# Altium PCB PCB_01_02.PcbDoc
Units mil, origin at the board's own origin, x right, y up, seen from the top; angles counter-clockwise.
Board outline 3750 x 3090 mil, 2 copper layers (Top Layer, Bottom Layer); 25 components, 52 nets, 150 pads, 22 vias.
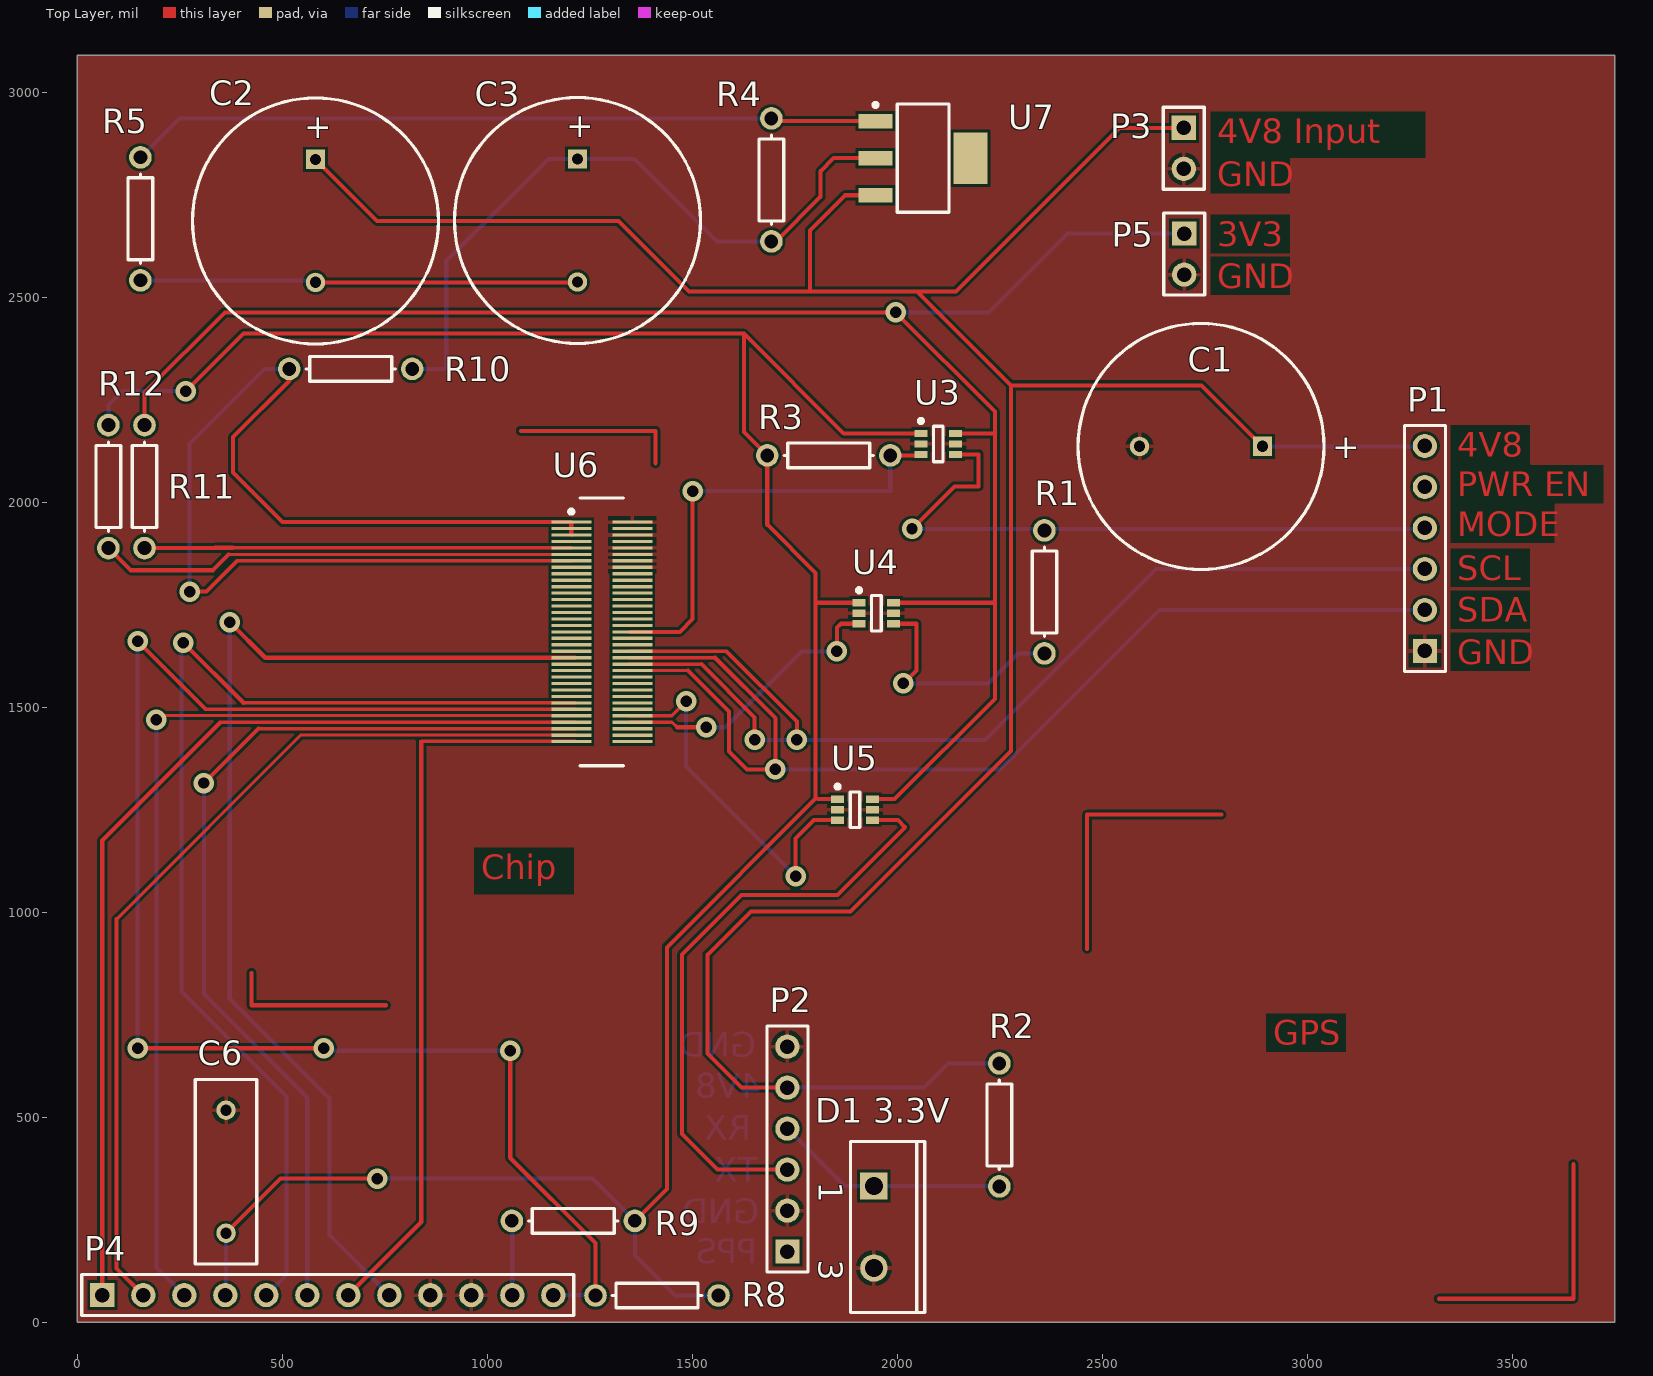
[diagram p0: Top Layer view]
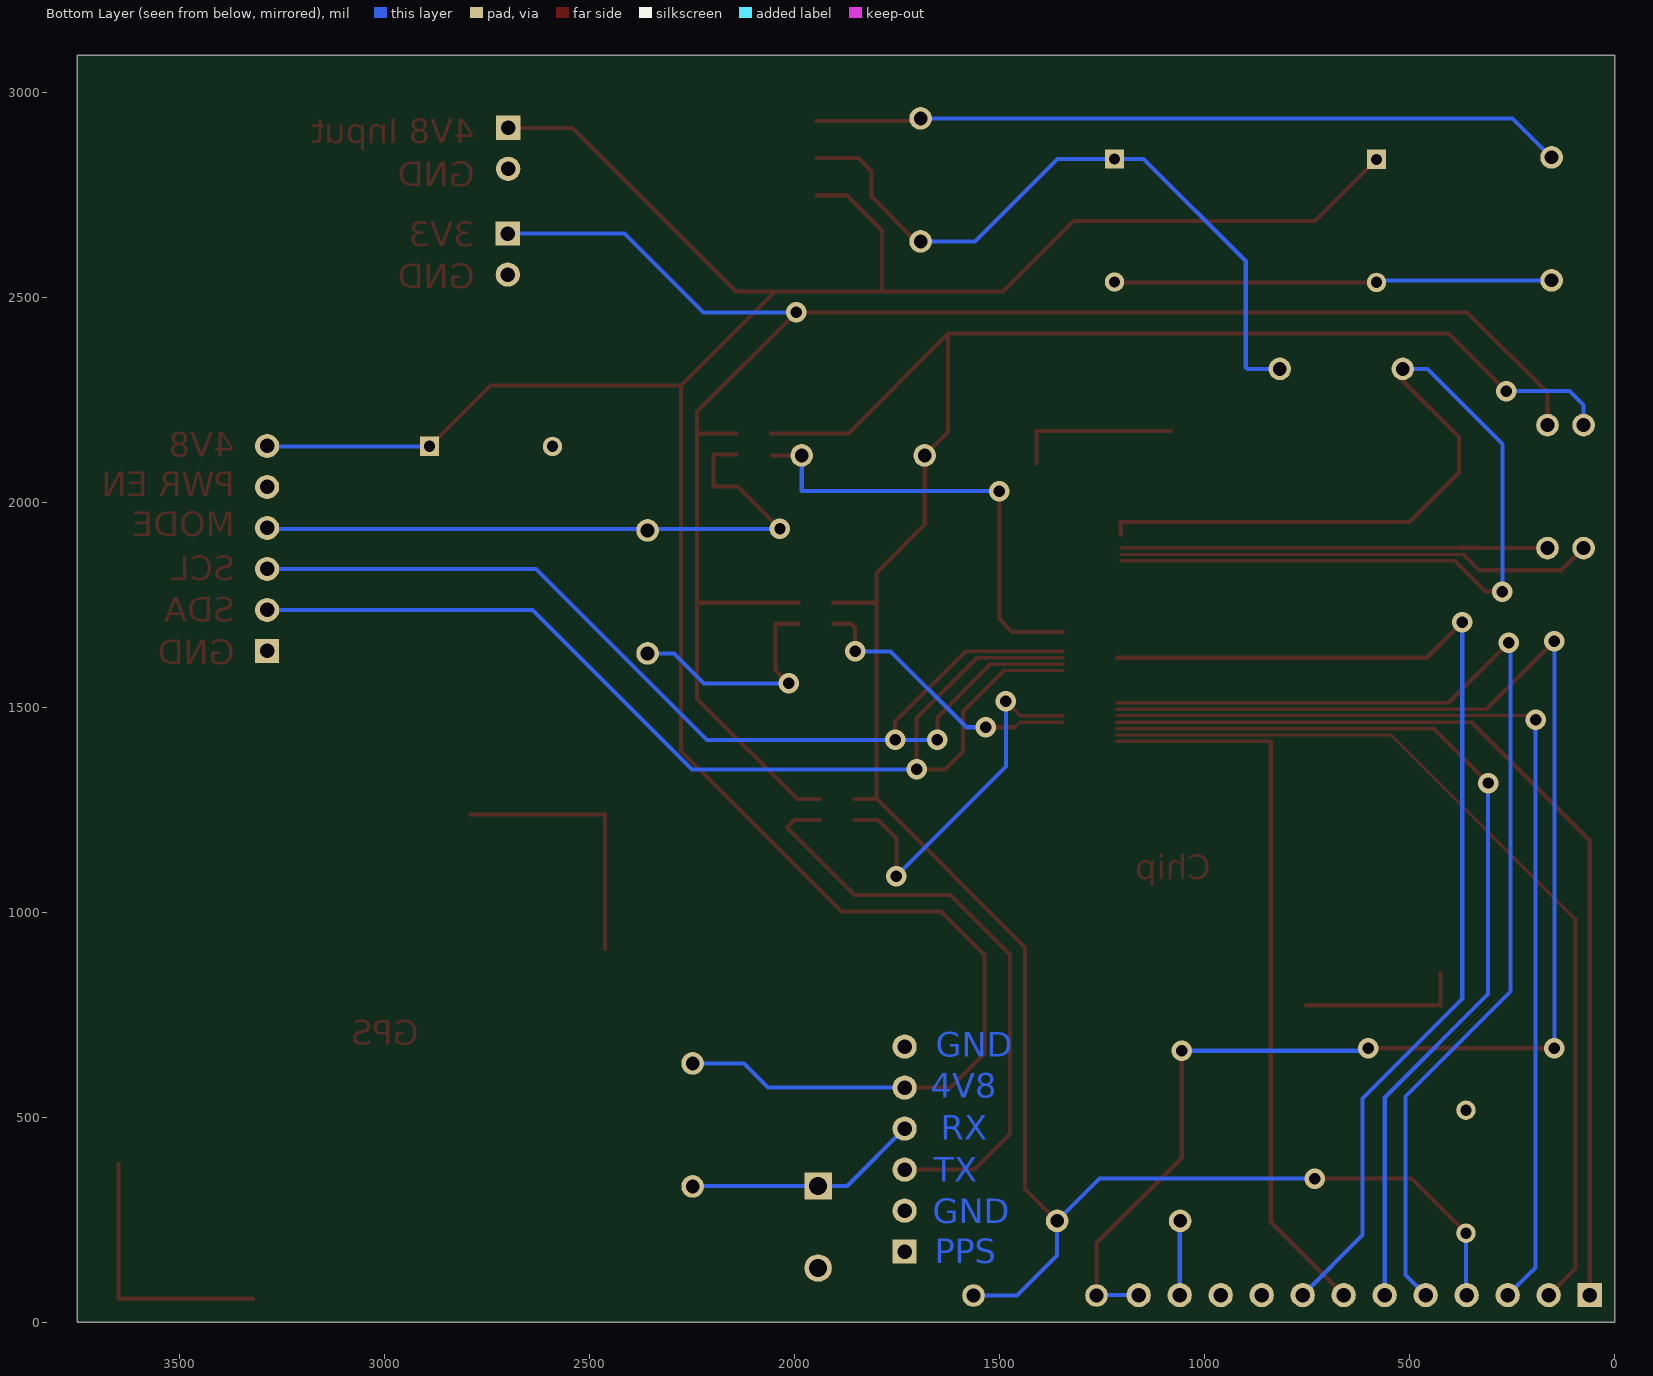
[diagram p1: Bottom Layer view, seen from below]

## Layer stack, top to bottom
Top Solder: solder mask 0.4, Solder Resist, Dk 3.5
Top Layer: signal copper 1.4
Dielectric 1: dielectric 12.6, FR-4, Dk 4.8
Bottom Layer: signal copper 1.4
Bottom Solder: solder mask 0.4, Solder Resist, Dk 3.5

## Board outline
0,0 0,3090 3750,3090 3750,3058 3750,0

## Design rules (kind name [scope] priority, off if disabled: settings)
Clearance [All] p1: gap=6.5
PolygonConnect [All] p1: connectstyle=Relief reliefconductorwidth=10 reliefentries=4 polygonreliefangle="90 Angle" airgapwidth=10
RoutingVias [All] p1: holewidth=28 width=50 viastyle="Through Hole" minholewidth=28 minwidth=50 maxholewidth=28 maxwidth=50
SolderMaskExpansion [All] p1: expansion=4
Width [All] p1: maxlimit=10 minlimit=7 preferedwidth=10
30 further rules are at their usual default settings.

## Classes and differential pairs
component class PCB_01_02: P4 P5

## Components (designator, comment, footprint, x,y, rotation, side; value= is the part's Value field where it differs from the comment)
C1 "Cap Pol1" RB7.6-15 2741,2136 r0 top
C2 "Cap Pol1" RB7.6-15 581,2686 r90 top
C3 "Cap Pol1" RB7.6-15 1220,2687 r90 top
C6 "Cap" RAD-0.3 363,367 r270 top
"D1 3.3V" "1N5257B" TO-220AC 1943,232 r270 top (schematic designator "D1     3.3V")
P1 "LiDAR" HDR1X6 3287,1637 r90 top
P2 "GPS" HDR1X6 1732,172 r90 top
P3 "4.8V Battery" HDR1X2 2699,2913 r270 top
P4 "Header 12" HDR1X12 61,66 r0 top
P5 "Header 2" HDR1X2 2700,2655 r270 top
R1 "Res1" AXIAL-0.3 2359,1781 r90 top
R2 "Res1" AXIAL-0.3 2249,481 r270 top
R3 "Res1" AXIAL-0.3 1833,2114 r180 top
R4 "Res1" AXIAL-0.3 1693,2786 r90 top
R5 "Res1" AXIAL-0.3 154,2691 r270 top
R8 "Res1" AXIAL-0.3 1414,65 r0 top
R9 "Res1" AXIAL-0.3 1210,247 r0 top
R10 "Res1" AXIAL-0.3 667,2325 r180 top
R11 "Res1" AXIAL-0.3 164,2038 r90 top
R12 "Res1" AXIAL-0.3 76,2038 r90 top
U3 "Level Shifter" 74LVC1T45 2100,2142 r0 top
U4 "Level Shifter" 74LVC1T45 1949,1729 r0 top
U5 "Level Shifter" 74LVC1T45 1897,1250 r0 top
U6 "DF40(3)_70Pin" DF40(2)_70PIN_02 1279.33,1683.63 r0 top locked
U7 "RT9164A-33G" RT9164A-33GG 2063,2839 r0 top

## Footprints (in the part's own frame and the unit in brackets; to place one, negate y for a bottom-side part, rotate by r counter-clockwise, add the part's x,y. Pads: shape width x height; smd on the part's side, far side on the other; paste and mask are expansions set on the pad)
74LVC1T45 [mm] "SOT65P210X110-6N, SOT23, 6-Leads, Body 2.00x2.10mm, Pitch 0.65mm, IPC Medium Density"
  rect 0.8x0.45 smd: 1(-1.075,0.65) 2(-1.075,0) 3(-1.075,-0.65) 4(1.075,-0.65) 5(1.075,0) 6(1.075,0.65)
  silkscreen extent -1.2,-1.1 0.3,1.55, body extent -0.67,-1.1 0.67,1.1, height 1.1
AXIAL-0.3 [mm] "Axial Device, Thru-Hole; 2 Leads; 0.3 in Pin Spacing"
  round 1.4 hole 0.85: 1(-3.81,0) 2(3.81,0)
  silkscreen extent -2.77,-0.76 2.77,0.76
DF40(2)_70PIN_02 [mm] "SOICJ127P600-8N, E 3.78-6.26, A 1.95, A1 0.15, E1 2.38, D 16.6, PIN 70, B 0.18-0.22, L 1.24-2.48, e 0.4, S 1.3-1.5, X 0.2, Y 2.48, C 3.78, Rectangular, (mm)"
  rect 2.48x0.2 smd: 1(1.89,6.8) 2(-1.89,6.8) 3(1.89,6.4) 4(-1.89,6.4) 5(1.89,6) 6(-1.89,6) 7(1.89,5.6) 8(-1.89,5.6) 9(1.89,5.2) 10(-1.89,5.2) 11(1.89,4.8) 12(-1.89,4.8) 13(1.89,4.4) 14(-1.89,4.4) 15(1.89,4) 16(-1.89,4) 17(1.89,3.6) 18(-1.89,3.6) 19(1.89,3.2) 20(-1.89,3.2) 21(1.89,2.8) 22(-1.89,2.8) 23(1.89,2.4) 24(-1.89,2.4) 25(1.89,2) 26(-1.89,2) 27(1.89,1.6) 28(-1.89,1.6) 29(1.89,1.2) 30(-1.89,1.2) 31(1.89,0.8) 32(-1.89,0.8) 33(1.89,0.4) 34(-1.89,0.4) 35(1.89,0) 36(-1.89,0) 37(1.89,-0.4) 38(-1.89,-0.4) 39(1.89,-0.8) 40(-1.89,-0.8) 41(1.89,-1.2) 42(-1.89,-1.2) 43(1.89,-1.6) 44(-1.89,-1.6) 45(1.89,-2) 46(-1.89,-2) 47(1.89,-2.4) 48(-1.89,-2.4) 49(1.89,-2.8) 50(-1.89,-2.8) 51(1.89,-3.2) 52(-1.89,-3.2) 53(1.89,-3.6) 54(-1.89,-3.6) 55(1.89,-4) 56(-1.89,-4) 57(1.89,-4.4) 58(-1.89,-4.4) 59(1.89,-4.8) 60(-1.89,-4.8) 61(1.89,-5.2) 62(-1.89,-5.2) 63(1.89,-5.6) 64(-1.89,-5.6) 65(1.89,-6) 66(-1.89,-6) 67(1.89,-6.4) 68(-1.89,-6.4) 69(1.89,-6.8) 70(-1.89,-6.8)
  silkscreen extent -2.01,-8.3 1.35,8.3, body extent -1.19,-8.3 1.19,8.3, height 1.95
HDR1X2 [mm] "Connector; Header; 2 Position"
  rect 1.5x1.5 hole 0.9: 1(0,0)
  round 1.5 hole 0.9: 2(2.54,0)
  silkscreen extent -1.27,-1.27 3.81,1.27
HDR1X6 [mm] "Connector; Header; 6 Position"
  rect 1.5x1.5 hole 0.9: 1(0,0)
  round 1.5 hole 0.9: 2(2.54,0) 3(5.08,0) 4(7.62,0) 5(10.16,0) 6(12.7,0)
  silkscreen extent -1.27,-1.27 13.97,1.27
HDR1X12 [mm] "Connector; Header; 12 Position"
  rect 1.5x1.5 hole 0.9: 1(0,0)
  round 1.5 hole 0.9: 2(2.54,0) 3(5.08,0) 4(7.62,0) 5(10.16,0) 6(12.7,0) 7(15.24,0) 8(17.78,0) 9(20.32,0) 10(22.86,0) 11(25.4,0) 12(27.94,0)
  silkscreen extent -1.27,-1.27 29.21,1.27
RAD-0.3 [mm] "Radial Cap, Thru-Hole; 2 Leads; 0.3 in Pin Spacing"
  round 1.2 hole 0.7: 1(-3.81,0) 2(3.81,0)
  silkscreen extent -5.71,-1.91 5.71,1.91
RB7.6-15 [mm] "Polarized Capacitor (Radial); 2 Leads"
  rect 1.2x1.2 hole 0.7: 1(3.81,0)
  round 1.2 hole 0.7: 2(-3.81,0)
  silkscreen extent -7.62,-7.62 7.62,7.62
RT9164A-33GG [mm] "SOT230P700X180-4N, SOT223, 4-Leads, Body 6.50x7.00mm (avg), Pitch 2.30mm, IPC Medium Density"
  rect 2.1x0.9 smd: 1(-2.95,2.3) 2(-2.95,0) 3(-2.95,-2.3)
  rect 2.1x3.2 smd: 4(2.95,0)
  silkscreen extent -3.07,-3.35 1.6,3.42, body extent -1.85,-3.35 1.85,3.35, height 1.8
TO-220AC [mm] "TO, Thru-Hole, Vertical, Heatsink Mounted; 3 In-Line Leads (1 Absent); Pitch 2.54 mm"
  rect 1.7x1.7 hole 1.1: 1(-2.54,0)
  round 1.7 hole 1.1: 3(2.54,0)
  silkscreen extent -5.3,-1.45 5.3,3.15

## Part data
C1 C2 C3: "Polarized Capacitor (Radial)"
C6: "Capacitor"
"D1 3.3V": library part "Diode 10TQ040", "Schottky Rectifier"
P1: library part "Header 6", "Header, 6-Pin, for LiDAR"
P2: library part "Header 6", "Header, 6-Pin, for GPS"
P3: library part "Header 2H", "Header, 2-Pin, Right Angle"
P4: "Header, 12-Pin"
P5: "Header, 2-Pin"
R1 R2 R3 R4 R5 R8 R9 R10 R11 R12: "Resistor"
U3 U4 U5: library part Component_1, "74LVC1T45 Level Shifter"
U7: "PW REG"

## Via types
v1: diameter 50, hole 28, Top Layer to Bottom Layer, 22 vias

## Nets (pads, with @x,y where several pads share a name; then routed paths per layer and width w, separated by ;. In a path a pad name is that pad's centre, name@x,y a point inside that pad or via, vN(x,y) a via of type N, cw(c..) or ccw(c..) an arc to the next point about the centre after c; other vN are vias at no path point)
GND: "D1 3.3V.3" C1.2 C6.1 P1.1 P2.2 P2.6 P3.2 P4.9 P4.10 P5.2 U3.2 U3.5 U4.2 U4.5 U5.2 U5.5 U6.1 U6.5 U6.9 U6.11 U6.13 U6.15
NetC1_1: 
NetC2_1: 
NetC2_2: 
NetC3_1: 
NetC4_2: 
NetC6_2: 
NetC8_2: 
NetCN1_1: 
NetCN1_2: 
NetCN1_3: 
NetCN1_5: 
NetCN1_7: 
NetCN1_8: 
NetCN1_9: 
"NetD1     3.3V_1": "D1 3.3V.1" P2.4 R2.2 | length 574
  Bottom Layer w10: P2.4 1872,332 1943,332 R2.2@2248,332
NetP1_2: P1.2 U6.43 U6.47 | length 2801.5
  Top Layer w8: U6.47@1346.28,1589.42 1489.58,1589.42 ; U6.43@1346.28,1620.49 1555.51,1620.49
  Top Layer w10: 1489.58,1589.42 1590,1489 1590,1392 1634,1348 v1(1703,1348) 1703,1473 1555.51,1620.49
  Bottom Layer w10: v1(1703,1348) 2251,1348 2640,1737 P1.2
NetP1_3: P1.3 U6.41 U6.45 | length 2745.8
  Top Layer w8: U6.45@1346.28,1604.95 1522.05,1604.95 ; U6.41@1346.28,1636.02 1583.98,1636.02
  Top Layer w10: 1522.05,1604.95 1652,1475 v1(1652,1420) ; 1583.98,1636.02 1755,1465 v1(1755,1421)
  Bottom Layer w10: v1(1652,1420) 2214,1420 2631,1837 P1.3
NetP1_4: P1.4 R1.2 U3.4 | length 1588.6
  Top Layer w10: v1(2036,1935) 2139.59,2038.59 2198.59,2038.59 2198.59,2116.41 U3.4
  Bottom Layer w10: v1(2036,1935) P1.4@3285,1935
NetP2_3: P2.3 U5.4 | length 1490.3
  Top Layer w10: P2.3 1562,372 1475,459 1475,897 1620,1042 1854,1042 2019,1207 2001.59,1224.41 U5.4
NetP4_1: P4.1 U6.64 | length 2381.3
  Top Layer w8: 348,1463.13 U6.64@1214.39,1463.13
  Top Layer w10: P4.1 61,1175 348,1462
NetP4_2: P4.2 U6.68 | length 2248.3
  Top Layer w8: 96,983 545.06,1432.06 U6.68@1214.39,1432.06
  Top Layer w10: 96,983 96,131 P4.2
NetP4_3: P4.3 U6.62 | length 2452.3
  Top Layer w8: v1@193.33,1479.67 U6.62@1214.39,1479.67
  Top Layer w10: v1(193,1469) v1@193.33,1468.67
  Bottom Layer w10: v1(193,1469) 193,133 201,125 ; 202,125 P4.3
NetP4_4: 
NetP4_5: P4.5 U6.58 | length 2735.4
  Top Layer w8: 405.26,1510.74 414.26,1510.74 U6.58@1214.39,1510.74
  Top Layer w10: v1(259,1657) 405.26,1510.74
  Bottom Layer w10: v1(259,1657) 254,1652 254,806 510,550 510,115 P4.5
NetP4_6: P4.6 U6.66 | length 2313.7
  Top Layer w8: 441.6,1447.6 U6.66@1214.39,1447.6
  Top Layer w10: v1(309,1315) 441.6,1447.6
  Bottom Layer w10: v1(309,1315) 309,800 561,548 P4.6
NetP4_7: P4.7 U6.70 | length 1799.6
  Top Layer w8: 839,1416.53 U6.70@1214.39,1416.53
  Top Layer w10: P4.7 839,244 839,1416.53
NetP4_8: P4.8 U6.44 | length 2680.3
  Top Layer w10: v1(372,1707) 458.51,1620.49 U6.44@1214.39,1620.49
  Bottom Layer w10: v1(372,1707) 372,788 615,545 615,212 P4.8
NetP4_11: P4.11 R9.1 | length 180
  Bottom Layer w10: P4.11 R9.1@1061,246
NetP4_12: P4.12 R8.1 U6.60 | length 3822.7
  Top Layer w8: 312.8,1495.2 321.8,1495.2 U6.60@1214.39,1495.2
  Top Layer w10: v1(147,668) v1(601,668) ; v1(147,1661) 312.8,1495.2 ; v1(1056,662) 1056,401 1264,193 R8.1
  Bottom Layer w10: v1(147,668) v1@147,1658 ; v1(601,668) 607,662 v1(1056,662) ; P4.12 R8.1@1263,66
NetR1_1: R1.1 U4.4 | length 588
  Top Layer w10: U4.4 2046.59,1703.41 2046.59,1589.59 v1(2015,1558)
  Bottom Layer w10: v1(2015,1558) 2221,1558 2294,1631 R1.1
NetR3_1: R3.1 U3.3 U6.35 | length 1121
  Top Layer w10: U6.35@1346.28,1683.63 1469.63,1683.63 1501,1715 v1(1501,2027) ; R3.1 U3.3@2055.27,2114
  Bottom Layer w10: v1(1501,2027) 1983,2027 R3.1
NetR4_2: R4.2 R5.1 U7.1 | length 1825.8
  Top Layer w10: R4.2@1699.45,2929.55 U7.1
  Bottom Layer w10: R5.1 249,2936 R4.2
NetR5_2: C2.2 C3.2 R5.2 | length 1060
  Top Layer w10: C2.2 C3.2@1219,2536
  Bottom Layer w10: R5.2 C2.2@576,2541
NetR6_2: 
NetR9_1: 
NetR10_2: R10.2 U6.2 U6.4 U6.6 U6.14 | length 2856.9
  Top Layer w8: 389.86,1856.86 U6.14
  Top Layer w10: v1(274,1782) 315,1782 389.86,1856.86 ; R10.2 517,2296 380,2159 380,2072 500.65,1951.35 U6.2 U6.4 U6.6
  Bottom Layer w10: v1(274,1782) 274,2142 457,2325 R10.2
NetR11_1: R11.1 U6.10 | length 1041.3
  Top Layer w8: 378.19,1888.86 U6.10@1204.92,1888.86
  Top Layer w10: R11.1 335,1888 335.86,1888.86 378.19,1888.86
NetR12_1: R12.1 U6.12 | length 1167.2
  Top Layer w8: 369.36,1872.36 U6.12@1204.92,1872.36
  Top Layer w10: R12.1 130,1834 331,1834 369.36,1872.36
NetR12_2: C6.2 P4.4 R3.2 R8.2 R9.2 R12.2 U3.1 U4.1 U5.1 | length 6349.4
  Top Layer w10: v1(265,2271) 405,2411 1626,2411 ; C6.2 496,350 v1(732,350) ; R9.2 1438,325 1438,914.18 1801,1277.18 1801,1754.59 ; 1806,1275.59 U5.1 ; U4.1 1801,1754.59 ; U3.1 1869.41,2167.59 1626,2411 ; 1626,2411 1626,2171 R3.2 1683,1945 1801,1827 1801,1754.59
  Bottom Layer w10: R12.2 76,2237 110,2271 v1(265,2271) ; P4.4@363,68 C6.2 ; v1(732,350) 1257,350 R9.2 1360,163 1458,65 R8.2
NetU1_A1: 
NetU1_B1: 
NetU1_C1: 
NetU1_D1: 
NetU1_D2: 
NetU1_E1: 
NetU1_E2: 
NetU3_6: P5.1 R11.2 U3.6 U4.6 U5.6 | length 4560.4
  Top Layer w10: R11.2 164,2267 360,2463 v1(1996,2463) 2238,2221 2238,1520 1993.59,1275.59 U5.6 ; U4.6 2237.59,1754.59 ; U3.6 2237.59,2167.59
  Bottom Layer w10: v1(1996,2463) 2223,2463 2415,2655 P5.1
NetU4_3: U4.3 U6.63 | length 703.4
  Top Layer w8: U6.63@1346.98,1463.43 1450.57,1463.43 1463,1451
  Top Layer w10: 1463,1451 v1(1534,1451) ; v1(1853,1636) 1853,1694 1862.41,1703.41 U4.3
  Bottom Layer w10: v1(1534,1451) 1581,1451 1766,1636 v1(1853,1636)
NetU5_3: U5.3 U6.61 | length 903
  Top Layer w8: U6.61@1346.28,1478.67 1346.54,1478.93 1449.93,1478.93 v1(1485,1514)
  Top Layer w10: v1(1752,1088) 1752,1180 1796.41,1224.41 U5.3
  Bottom Layer w10: v1(1485,1514) 1485,1355 v1(1752,1088)
NetU7_2: C3.1 R4.1 R10.1 U7.2 | length 1697.3
  Top Layer w10: R4.1 1704,2636 1813,2745 1813,2807 1845,2839 U7.2
  Bottom Layer w10: R10.1 896,2325 900,2329 900,2588 1149,2837 C3.1 1359,2837 1560,2636 R4.1
NetU7_3: C1.1 C2.1 P1.6 P2.5 P3.1 R2.1 U7.3 | length 7004.2
  Top Layer w10: C2.1 731,2686 1320,2686 1492,2514 2048,2514 ; P2.5 1620,572 1537,655 1537,896 1643,1002 1886,1002 2277,1393 2277,2285 ; 1787,2515 1787,2663 1872.45,2748.45 U7.3 ; P3.1 2542,2913 2143,2514 2048,2514 ; C1.1 2742,2285 2277,2285 ; 2048,2514 2277,2285
  Bottom Layer w10: P2.5 2065,572 2124,631 R2.1 ; C1.1 P1.6@3286,2136
pads on no net: P1.5 P2.1 U6.3 U6.7 U6.8 U6.16 U6.17 U6.18 U6.19 U6.20 U6.21 U6.22 U6.23 U6.24 U6.25 U6.26 U6.27 U6.28 U6.29 U6.30 U6.31 U6.32 U6.33 U6.34 U6.36 U6.37 U6.38 U6.39 U6.40 U6.42 U6.46 U6.48 U6.49 U6.50 U6.51 U6.52 U6.53 U6.54 U6.55 U6.56 U6.57 U6.59 U6.65 U6.67 U6.69 U7.4
copper on no net: | length 2126
  Top Layer w10: 425,852 425,773 753,773 ; 1082,2174 1410,2174 1410,2095 ; 2463,910 2463,1238 2791,1238 ; 3321,57 3649,57 3649,385

## Polygon pours and split planes (outlines as drawn)
GND on Top Layer "Top Layer-GND" (solid, pour order 0): 0,0 0,3090 3750,3090 3750,0

## Other copper
Top Layer:
  text "4V8 Input" at 2781,2876 h60
  text "GND" at 2781,2770 h60
  text "3V3" at 2781,2624 h60
  text "GND" at 2781,2522 h60
  text "4V8" at 3366,2111 h60
  text "PWR EN" at 3366,2014 h60
  text "MODE" at 3366,1917 h60
  text "SCL" at 3366,1810 h60
  text "SDA" at 3366,1708 h60
  text "GND" at 3366,1605 h60
  text "Chip" at 985,1080 h60
  text "GPS" at 2917,676 h60
Bottom Layer:
  text "GND" at 1656,647 h60
  text "4V8" at 1668,547 h60
  text "RX" at 1644,445 h60
  text "TX" at 1661,343 h60
  text "GND" at 1664,241 h60
  text "PPS" at 1659,144 h60

## Silkscreen, mask and mechanical layers (free items; w line width, h text height)
Mechanical 1:
  the board outline again, w47.24

## Text inside footprints (layer, text, board x,y; h text height)
C1: Top Overlay "+" at 3061.15,2106.99 h59.06
C2: Top Overlay "+" at 612,2879 h59.06 r90
C3: Top Overlay "+" at 1251,2882 h59.06 r90
"D1 3.3V": Top Overlay "3" at 1808.16,151.68 h59.06 r270; Top Overlay "1" at 1808.16,341.84 h59.06 r270